# Altium PCB ESP32_Board.PcbDoc
Units mm, origin at the board's own origin, x right, y up, seen from the top; angles counter-clockwise.
Board outline 45.1 x 40 mm, 4 copper layers (L1 (SIG), L2 (GND), L3 (GND), L4 (SIG)), stack 1.586 mm thick; 43 components, 35 nets, 167 pads, 0 vias.
Unrouted connection lines stored in the file: 103.
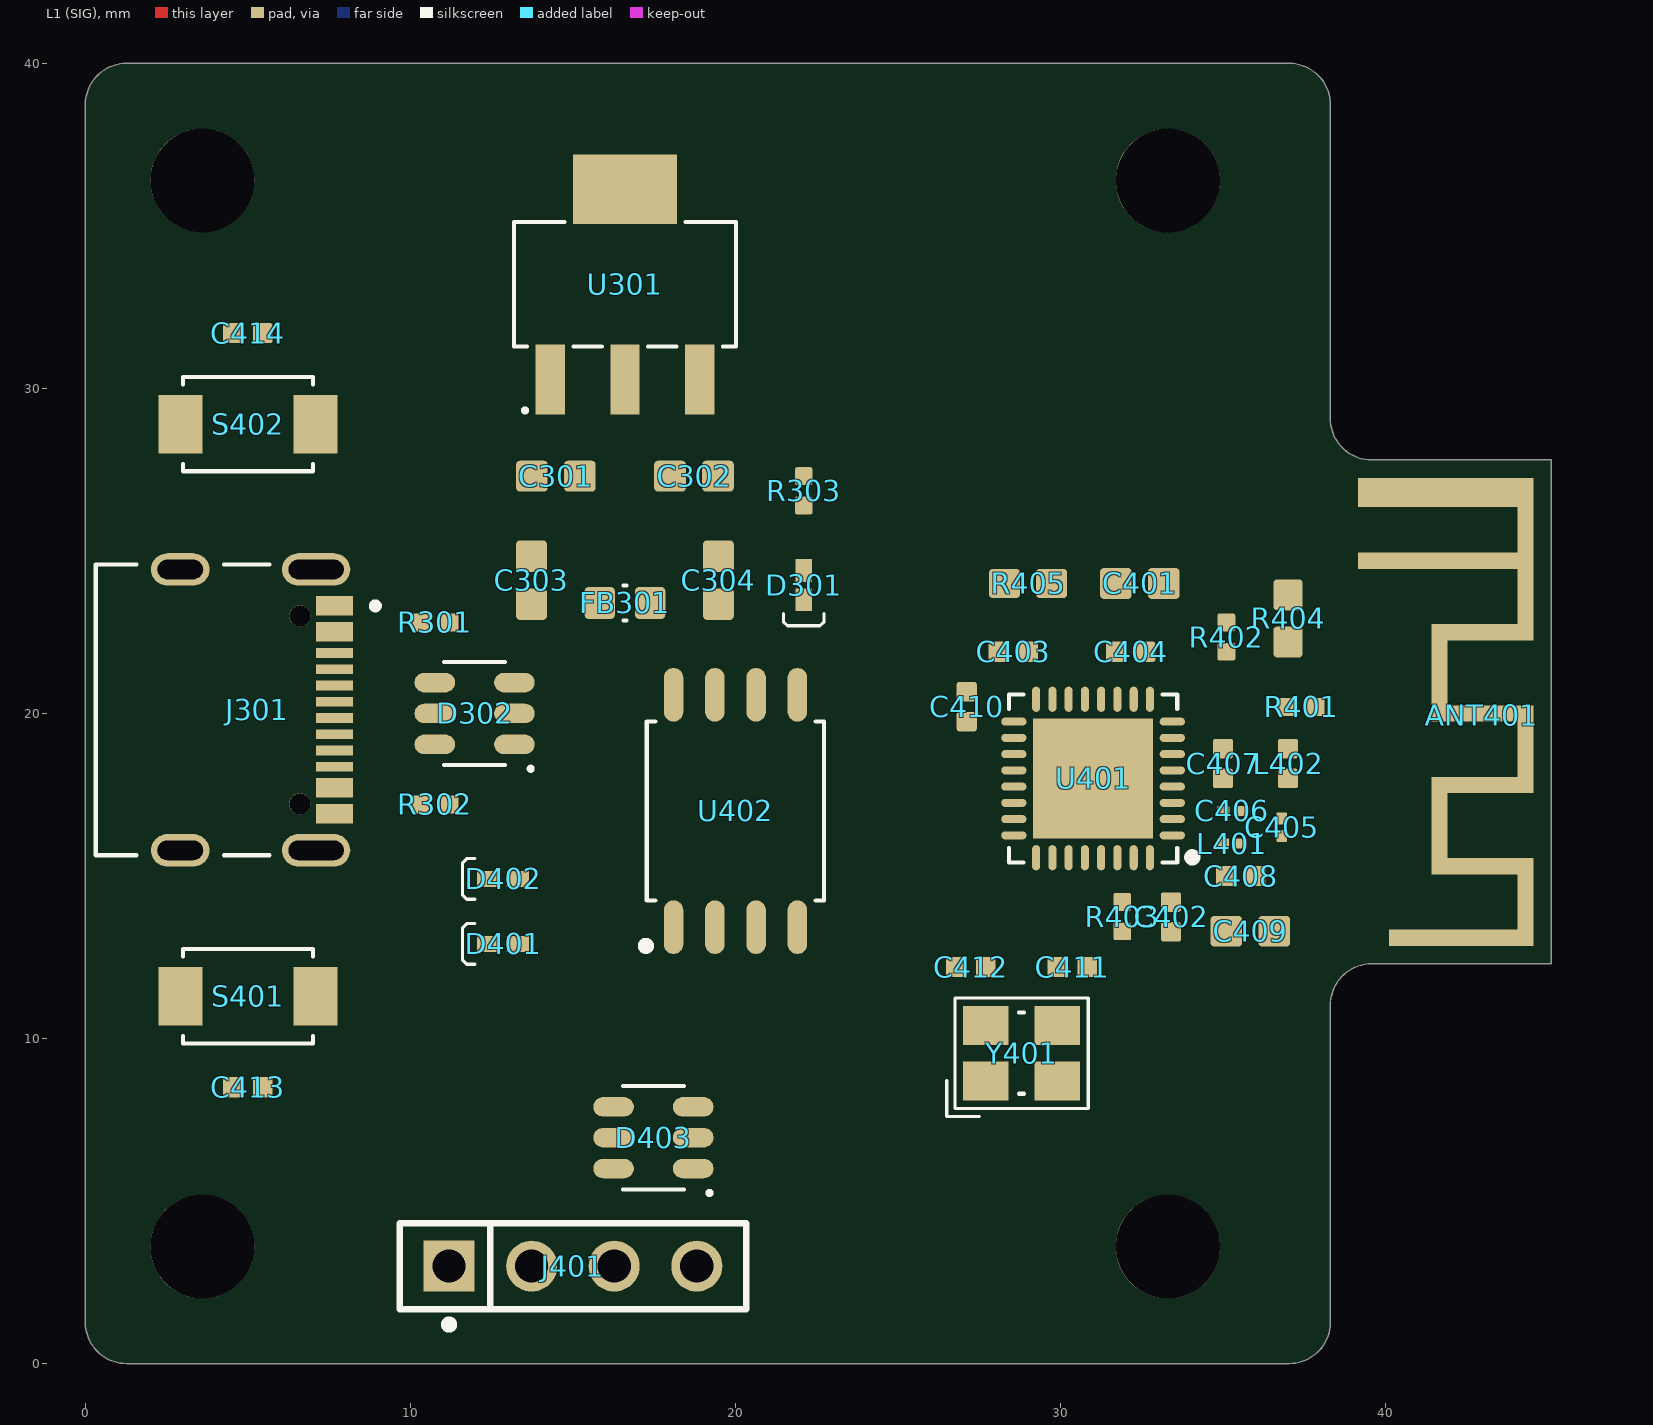
[diagram p0: L1 (SIG) view]
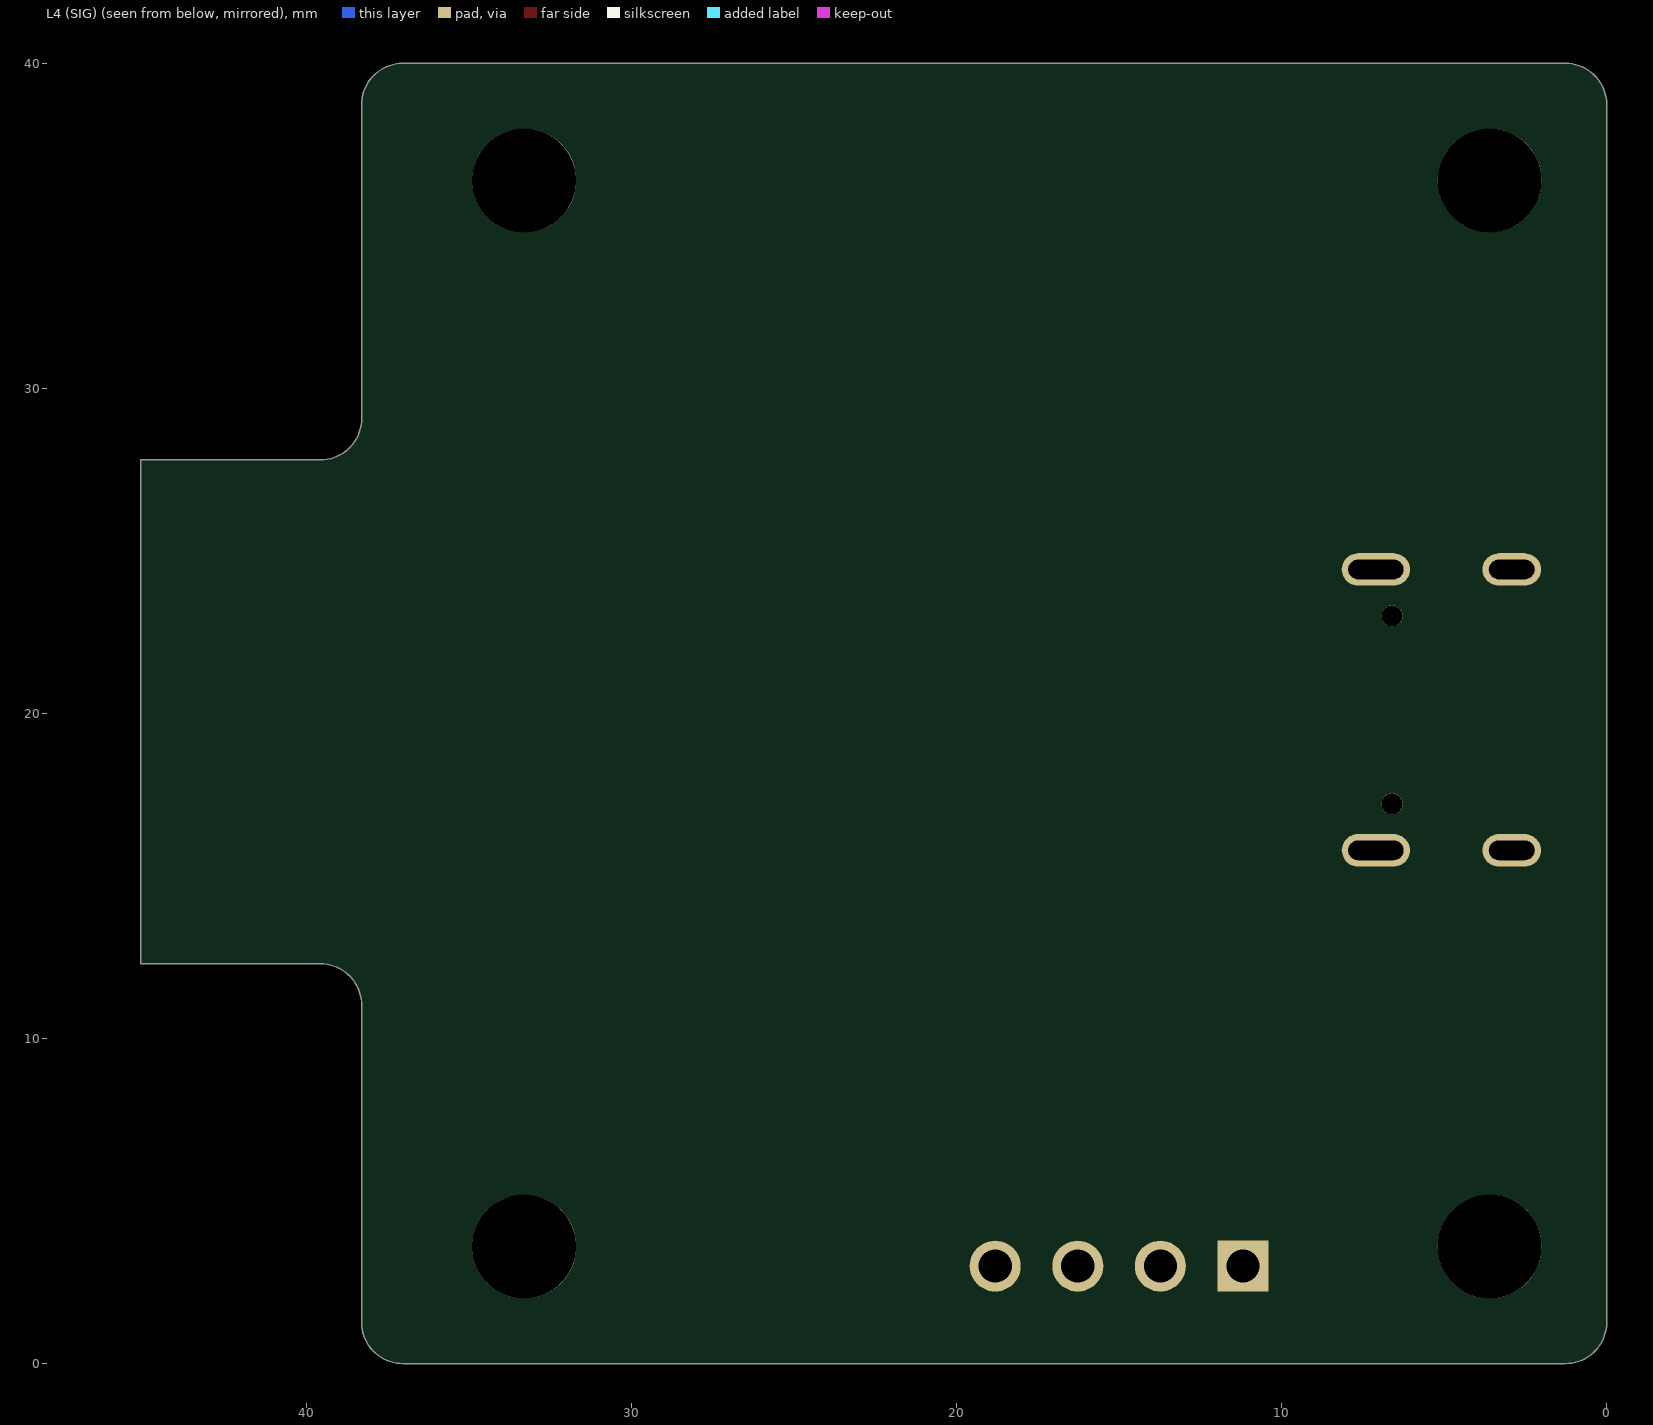
[diagram p1: L4 (SIG) view, seen from below]

## Layer stack, top to bottom
Top Solder: solder mask 0.0102, Solder Resist, Dk 3.5
L1 (SIG): signal copper 0.035
Dielectric 2: prepreg 0.2104, PP-023, Dk 4.5
L2 (GND): signal copper 0.0152
Dielectric 1: core 1.065, Core-039, Dk 4.8
L3 (GND): signal copper 0.0152
Dielectric 3: prepreg 0.2104, PP-023, Dk 4.5
L4 (SIG): signal copper 0.035
Bottom Solder: solder mask 0.0102, Solder Resist, Dk 3.5

## Board outline
1.27,0 cw(c1.27,1.27) 0,1.27 0,38.73 cw(c1.27,38.73) 1.27,40 37.03,40 cw(c37.03,38.73) 38.3,38.73 38.3,29.07 ccw(c39.57,29.07) 39.57,27.8 45.1,27.8 45.1,12.3 39.57,12.3 ccw(c39.57,11.03) 38.3,11.03 38.3,1.27 cw(c37.03,1.27) 37.03,0

## Design rules (kind name [scope] priority, off if disabled: settings)
Clearance [All] p1: gap=0.2 ignorepadtopadclearanceinfootprint=TRUE except(0.3: Arc-Arc Arc-Track Track-Track; 0.45: THPad-THPad)
DiffPairsRouting DIFF90 [All] p1: maxlimit=0.254 minlimit=0.127 mostfreqgap=0.254 toplayer_maxgap=0.127 toplayer_prefgap=0.127 toplayer_minwidth=0.237 toplayer_maxwidth=0.237 toplayer_prefwidth=0.237 bottomlayer_maxgap=0.127 bottomlayer_prefgap=0.127 bottomlayer_minwidth=0.237 bottomlayer_maxwidth=0.237 bottomlayer_prefwidth=0.237 impedanceprofiledriven=TRUE impedanceprofileid={447BC607-A005-4FB5-B479-7A6E157B78A7} impedanceprofilevalue=90.000000 maxuncoupledlength=12.7 // USB Differential Pair
FabricationTestpoint [All] p1: side=3 testpointundercomponent=TRUE minsize=1.016 maxsize=2.54 preferedsize=1.524 minholesize=0 maxholesize=1.016 preferedholesize=0.813 testpointgrid=0.025 allowsidetop=TRUE allowsidebottom=TRUE usegrid=TRUE gridoriginx=0 gridoriginy=-25.4 gridtolerance=0
HoleSize [All] p1: absolutevalues=TRUE maxlimit=6 minlimit=0.2 maxpercent=80.000 minpercent=20.000
MinimumAnnularRing [All] p1: minimumring=0.254
PolygonConnect [All] p1: connectstyle=Relief reliefconductorwidth=0.254 reliefentries=4 polygonreliefangle="90 Angle" airgapwidth=0.254
RoutingVias [All] p1: holewidth=0.75 width=1 viastyle="Through Hole" minholewidth=0.25 minwidth=0.5 maxholewidth=1.35 maxwidth=1.5
SolderMaskExpansion [All] p1: expansion=0 istentingtop=FALSE
SupplyNets "Schematic Supply Nets_6" [InNet('VBUS')] p1: voltage=0.000
SupplyNets "Schematic Supply Nets_5" [InNet('+3V3')] p2: voltage=0.000
SupplyNets "Schematic Supply Nets_4" [InNet('+5V')] p3: voltage=0.000
SupplyNets "Schematic Supply Nets_3" [InNet('+5')] p4: voltage=0.000
SupplyNets "Schematic Supply Nets_2" [InNet('0v')] p5: voltage=0.000
SupplyNets "Schematic Supply Nets_1" [InNet('VDD_RF')] p6: voltage=0.000
SupplyNets "Schematic Supply Nets" [InNet('VDD_SPI')] p7: voltage=0.000
Width ANTSEC [InNet('ANT_RF')] p1: maxlimit=0.262 minlimit=0.26 preferedwidth=0.262 toplayer_maxwidth=0.26 toplayer_prefwidth=0.26 bottomlayer_maxwidth=0.26 bottomlayer_prefwidth=0.26 impedanceprofiledriven=TRUE impedanceprofileid={694589E5-AF03-4A5D-9D68-AE147B80789B} impedanceprofilevalue=50.000000 minimp=50.000000 maximp=50.000000 favimp=50.000000 // Antennta Single-End Coplanar
Width ANTSE [InNet('ANT_RF')] p2: maxlimit=0.262 minlimit=0.254 preferedwidth=0.262 midlayer1_minwidth=0.262 midlayer2_minwidth=0.262 impedanceprofiledriven=TRUE impedanceprofileid={CE452B70-105D-400C-BFE0-BA0D3DE67E57} impedanceprofilevalue=50.000000 minimp=50.000000 maximp=50.000000 favimp=50.000000 // Antenna Single-End
Width General [All] p3: maxlimit=1.5 minlimit=0.1 preferedwidth=0.254
27 further rules are at their usual default settings.

## Classes and differential pairs
component class "POWER SUPPLY": C301 C302 C303 C304 D301 D302 FB301 J301 R301 R302 R303 U301
component class "MCU RF & MEMORY": ANT401 C401 C402 C403 C404 C405 C406 C407 C408 C409 C410 C411 C412 C413 C414 D401 D402 D403 J401 L401 L402 R401 R402 R403 R404 R405 S401 S402 U401 U402 Y401
differential pair USB_D: +USB_D_P -USB_D_N
differential pair MCU_USB_D: +MCU_USB_D_P -MCU_USB_D_N

## Components (designator, comment, footprint, x,y, rotation, side; value= is the part's Value field where it differs from the comment)
ANT401 "PCB ANTENNA 2.4GHz 50ohm" ANT_IFA_2_4GHZ_50R 39.15,26.8 r270 top
C301 "4u7" CAPC1608X90N 14.475,27.3 r0 top
C302 "4u7" CAPC1608X90N 18.725,27.3 r180 top
C303 "2u2" CAPC1608X90N 13.725,24.1 r90 top
C304 "2u2" CAPC1608X90N 19.475,24.1 r90 top
C401 "10u" CAPC1608X90N 32.437,24 r0 top
C402 "100n" CAPC1005X55N 33.4,13.74 r270 top
C403 "100n" CAPC1005X55N 28.54,21.9 r0 top
C404 "100n" CAPC1005X55N 32.16,21.9 r0 top
C405 "1.8p" CAPC0603X23L 36.8,16.5 r90 top
C406 "1.8p" CAPC0603X23L 35.27,17 r0 top
C407 "100n" CAPC1005X55N 35,18.46 r90 top
C408 "100n" CAPC1005X55N 35.54,15 r0 top
C409 "10u" CAPC1608X90N 35.838,13.3 r0 top
C410 "100n" CAPC1005X55N 27.115,20.212 r90 top
C411 "10p" CAPC1005X55N 30.36,12.2 r0 top
C412 "10p" CAPC1005X55N 27.24,12.2 r180 top
C413 "100n" CAPC1005X55N 5,8.5 r180 top
C414 "100n" CAPC1005X55N 5,31.7 r180 top
D301 "LED_0402_RED" LEDC0402 22.1,23.95 r270 top
D302 "USBLC6-2" SOT95P280X145-6N 11.975,20 r180 top
D401 "LED_0402_GREEN" LEDC0402 12.855,12.91 r180 top
D402 "LED_0402_GREEN" LEDC0402 12.855,14.91 r180 top
D403 "USBLC6-2" SOT95P280X145-6N 17.475,6.95 r180 top
FB301 "120R" FBC1608X95N 16.6,23.4 r0 top
J301 "TYPE-C 16PIN 2MD(073)" SHOUHAN_TYPE-C_16PIN_2MD_(073) 3.995,20.11 r270 top
J401 "M20-9990445" FP-M20-9990445-MFG 15,3 r0 top
L401 "2n2" INDC0603X33L 35.273,16 r180 top
L402 "2n2" INDC1005X55N 37,18.46 r90 top
R301 "5K1" RESC1005X37N 10.75,22.8 r0 top
R302 "5K1" RESC1005X37N 10.75,17.2 r0 top
R303 "1K" RESC1005X37N 22.1,26.85 r270 top
R401 "1K" RESC1005X37N 37.4,20.2 r0 top
R402 "1K" RESC1005X37N 35.1,22.35 r90 top
R403 "22R" RESC1005X37N 31.9,13.75 r270 top
R404 "5K1" RESC1608X47N 37,22.925 r90 top
R405 "5K1" RESC1608X47N 29,24 r180 top
S401 "TS-1088-AR02016" SW_TS-1088-AR02016 5,11.3 r180 top
S402 "TS-1088-AR02016" SW_TS-1088-AR02016 5,28.9 r180 top
U301 "AP2114HA" SOT230P700X180-4N 16.6,33.2 r90 top
U401 "ESP32-C3" QFN50P500X500X90-33N 31,18 r180 top
U402 "GD25Q16ESIGR" SOP127P790X216-8N 20,17 r90 top
Y401 "5YMA40000151SF40E1" XTAL_C3E-16.000-12-1015-R 28.8,9.55 r0 top

## Footprints (in the part's own frame and the unit in brackets; to place one, negate y for a bottom-side part, rotate by r counter-clockwise, add the part's x,y. Pads: shape width x height; smd on the part's side, far side on the other; paste and mask are expansions set on the pad)
ANT_IFA_2_4GHZ_50R [mm] "Inverted F 2.4GHz ISM PCB Antenna 50 Ohm"
  rect 5x0.5 smd paste-2539.97 mask+0.102: 1(2.05,5.15)
  rect 0.5x4.9 smd paste-2539.97 mask+0.102: 1(2.1,2.45)
  rect 0.5x2.64 smd paste-2539.97 mask+0.102: 1(4.3,3.58) 1(6.8,3.58) 1(9,3.58) 1(11.5,3.58)
  rect 2x0.5 smd paste-2539.97 mask+0.102: 1(5.55,2.51) 1(10.25,2.51)
  rect 2.7x0.5 smd paste-2539.97 mask+0.102: 1(7.9,5.15) 1(12.6,5.15)
  rect 0.5x3.94 smd paste-2539.97 mask+0.102: 1(13.7,2.93)
  rect 0.9x4.9 smd paste-2539.97 mask+0.102: 2(0,2.45)
CAPC0603X23L [mm] "Chip Capacitor, 2-Leads, Body 0,60x0,30mm, IPC High Density"
  rrect25% 0.38x0.32 smd: 1(-0.27,0) 2(0.27,0)
  body extent -0.3,-0.15 0.3,0.15, height 0.23
CAPC1005X55N [mm] "Chip Capacitor, 2-Leads, Body 1,00x0,50mm, IPC Medium Density"
  rrect25% 0.6x0.62 smd: 1(-0.46,0) 2(0.46,0)
  body extent -0.5,-0.25 0.5,0.25, height 0.55
CAPC1608X90N [mm] "Chip Capacitor, 2-Leads, Body 1,60x0,80mm, IPC Medium Density"
  rrect25% 0.975x0.95 smd: 1(-0.737,0) 2(0.738,0)
  body extent -0.8,-0.4 0.8,0.4, height 0.9
FBC1608X95N [mm] "Chip Ferrite Bead, 2-Leads, Body 1,60x0,80mm, IPC Medium Density"
  rrect25% 0.93x0.98 smd: 1(-0.775,0) 2(0.775,0)
  silkscreen extent -0.05,-0.54 0.05,0.54, body extent -0.8,-0.4 0.8,0.4, height 0.95
FP-M20-9990445-MFG [mm]
  rect 1.57x1.57 hole 1.02 paste-2539.97 mask+0: 1(-3.81,0)
  round 1.57 hole 1.02 paste-2539.97 mask+0: 2(-1.27,0) 3(1.27,0) 4(3.81,0)
  silkscreen extent -5.33,-1.92 5.33,1.32, body extent -5.43,-1.42 5.43,1.42, height 0.25
INDC0603X33L [mm] "Chip Inductor, 2-Leads, Body 0,60x0,30mm, IPC High Density"
  rrect25% 0.375x0.32 smd: 1(-0.272,0) 2(0.273,0)
  body extent -0.32,-0.17 0.32,0.17, height 0.33
INDC1005X55N [mm] "Chip Inductor, 2-Leads, Body 1,00x0,50mm, IPC Medium Density"
  rrect25% 0.6x0.62 smd: 1(-0.46,0) 2(0.46,0)
  body extent -0.53,-0.28 0.53,0.28, height 0.55
LEDC0402 [mm]
  rect 0.7x0.5 smd mask+0.05: 1(-0.45,0) 2(0.45,0)
  silkscreen extent 0.87,-0.63 1.25,0.63, body extent -0.5,-0.25 0.5,0.25, height 0.5
QFN50P500X500X90-33N [mm] "QFN, 32-Leads, Body 5,00x5,00mm, Pitch 0,50mm, Thermal Pad 3,70x3,70mm, IPC Medium Density"
  oval 0.775x0.25 smd: 1(-2.438,1.75) 2(-2.438,1.25) 3(-2.438,0.75) 4(-2.438,0.25) 5(-2.438,-0.25) 6(-2.438,-0.75) 7(-2.438,-1.25) 8(-2.438,-1.75) 17(2.437,-1.75) 18(2.437,-1.25) 19(2.437,-0.75) 20(2.437,-0.25) 21(2.437,0.25) 22(2.437,0.75) 23(2.437,1.25) 24(2.437,1.75)
  oval 0.25x0.775 smd: 9(-1.75,-2.437) 10(-1.25,-2.437) 11(-0.75,-2.437) 12(-0.25,-2.437) 13(0.25,-2.437) 14(0.75,-2.437) 15(1.25,-2.437) 16(1.75,-2.437) 25(1.75,2.438) 26(1.25,2.438) 27(0.75,2.438) 28(0.25,2.438) 29(-0.25,2.438) 30(-0.75,2.438) 31(-1.25,2.438) 32(-1.75,2.438)
  rect 3.7x3.7 smd paste-1.85: 33(0,0)
  silkscreen extent -3.18,-2.59 2.59,2.59, body extent -2.55,-2.55 2.55,2.55, height 0.9
RESC1005X37N [mm] "Chip Resistor, 2-Leads, Body 1,00x0,50mm, IPC Medium Density"
  rrect25% 0.55x0.55 smd: 1(-0.45,0) 2(0.45,0)
  body extent -0.5,-0.25 0.5,0.25, height 0.37
RESC1608X47N [mm] "Chip Resistor, 2-Leads, Body 1,60x0,80mm, IPC Medium Density"
  rrect25% 0.95x0.9 smd: 1(-0.725,0) 2(0.725,0)
  body extent -0.8,-0.4 0.8,0.4, height 0.47
SHOUHAN_TYPE-C_16PIN_2MD_(073) [mm]
  rect 0.6x1.15 smd paste+0 mask+0: A1_B12(-3.2,3.67) A4_B9(-2.4,3.67) B1_A12(3.2,3.67) B4_A9(2.4,3.67)
  rect 0.3x1.15 smd paste+0 mask+0: A5(-1.25,3.67) A6(-0.25,3.67) A7(0.25,3.67) A8(1.25,3.67) B5(1.75,3.67) B6(0.75,3.67) B7(-0.75,3.67) B8(-1.75,3.67)
  oval 1x1.8 hole 0.6 slot 1.4 at 90 deg mask+0.102: SH1(-4.32,-1.075) SH2(4.32,-1.075)
  oval 1x2.1 hole 0.6 slot 1.7 at 90 deg mask+0.102: SH3(-4.32,3.105) SH4(4.32,3.105)
  round 0.65 hole 0.65 unplated mask+0: ""(-2.89,2.605) ""(2.89,2.605)
  silkscreen extent -4.47,-3.67 4.47,5.02, body extent -4.47,-3.67 4.47,3.98, height 3.26
SOP127P790X216-8N [mm] "SOP, 8-Leads, Body 5,23x5,28mm, Pitch 1,27mm, IPC Medium Density"
  oval 1.65x0.6 smd: 1(-3.575,1.905) 2(-3.575,0.635) 3(-3.575,-0.635) 4(-3.575,-1.905) 5(3.575,-1.905) 6(3.575,-0.635) 7(3.575,0.635) 8(3.575,1.905)
  silkscreen extent -4.27,-2.73 2.75,2.88, body extent -3.95,-2.67 3.95,2.67, height 2.16
SOT95P280X145-6N [mm] "SOT23, 6-Leads, Body 2,93x2,80mm, Pitch 0,95mm, IPC Medium Density"
  oval 1.25x0.6 smd: 1(-1.225,0.95) 2(-1.225,0) 3(-1.225,-0.95) 4(1.225,-0.95) 5(1.225,0) 6(1.225,0.95)
  silkscreen extent -1.79,-1.59 0.94,1.76, body extent -1.6,-1.53 1.6,1.53, height 1.45
SOT230P700X180-4N [mm] "SOT223, 4-Leads, Body 6,50x7,00mm (avg), Pitch 2,30mm, IPC Medium Density"
  rect 2.15x0.9 smd: 1(-2.925,2.3) 2(-2.925,0) 3(-2.925,-2.3)
  rect 2.15x3.2 smd: 4(2.925,0)
  silkscreen extent -3.94,-3.41 1.91,3.41, body extent -3.5,-3.35 3.5,3.35, height 1.8
SW_TS-1088-AR02016 [mm]
  rect 1.35x1.8 smd: 1(-2.075,0) 2(2.075,0)
  silkscreen extent -2,-1.45 2,1.45, body extent -2.4,-1.45 2.4,1.45, height 2
XTAL_C3E-16.000-12-1015-R [mm]
  rect 1.4x1.2 smd: 1(-1.1,-0.85) 2(1.1,-0.85) 3(1.1,0.85) 4(-1.1,0.85)
  silkscreen extent -2.3,-1.95 2.05,1.7, body extent -1.6,-1.25 1.6,1.25, height 0.75

## Part data
ANT401: library part ANT_IFA_USB_2_4GHZ_50R, "Inverted F 2.4GHz ISM PCB Antenna 50 Ohm"
C301 C302 C303 C304 C401 C409: library part CAP_0603_16V, "Capacitor SMD 0603 16V"
C402 C403 C404 C407 C408 C410 C411 C412 C413 C414: library part CAP_0402_16V, "Capacitor SMD 0402 16V"
C405 C406: library part CAP_0201_16V, "Capacitor SMD 0201 16V"
D301: "LED RED SMD 0402"
D302 D403: "-40℃~+125℃ 150nA 17V 2 3.5pF 5.25V 5A 6V ESD IEC 61000-4-2 Unidirectional SOT-23-6L ESD and Surge Protection (TVS/ESD) ROHS"
D401 D402: "LED GREEN SMD 0402"
FB301: library part FB_0603, "Ferrite Bead SMD 0603"
J301: "DC-5V 5A Type C USB"
J401: library part CMP-00671-05399696-1, "M20-9990445 Conn Unshrouded Header HDR 4 POS 2.54mm Solder ST Thru-Hole Bulk/Loose", Case/Package=SIL, Color=Black, Contact Resistance=25mΩ, Current Rating=3A, Insulation Resistance=10GΩ, Max Operating Temperature=105°C, Min Operating Temperature=-40°C, Voltage Rating (AC)=750V, Connector Type="Male Pin", Contact Material="Brass, Bronze, Gold, Nickel", Contact Mating Length=6.096mm, Contact Plating=Gold, Depth=2.54mm, Gender=Male, Height=2.54mm, Housing Color=Black, Housing Material=Nylon, Lead Pitch=2.54mm, Length=10.16mm, Max Current Rating=3A, Mount="Through Hole", NexarPartId=5399696, Number Of Contacts=4, Number of Pins=4, Number of Positions=4, Number of Rows=1, Orientation=Straight, Pitch=2.54mm, Radiation Hardening=No, REACH SVHC="No SVHC", RoHS=Compliant, Termination=Solder, Voltage Rating (DC)=750V, Weight=45.359237g, Width=12.7mm
L401: library part IND_0201, "Inductor SMD 0201"
L402: library part IND_0402, "Inductor SMD 0402"
R301 R302 R303 R401 R402 R403: library part RES_0402, "Resistor SMD 0402"
R404 R405: library part RES_0603, "Resistor SMD 0603"
S401 S402: "50mA 4mm 100MÎ© 100,000 Times 12V 160gf 3mm 2mm Round Button Vertical welding SPST SMD Tactile Switches ROHS"
U301: library part AP2114HA-3.3TRG1, "-40℃~+85℃@(Ta) 1 1A 3.3V 30uVrms 65dB@(1kHz) 65uA 6V 750mV@(1A) Fixed Over Current Protection、Thermal Shutdown、使能控制 Positive SOT-223 Voltage Regulators - Linear, Low Drop Out (LDO) Regulators ROHS", Supplier 1=Newark, Supplier Part Number 1=AP2114HA-3.3TRG1
U401: "WiFi Modules (802.11) (Engineering Samples Only) SMD IC ESP32-C3, RISC-V single-core MCU, 2.4G Wi-Fi & BLE 5.0 combo, QFN 32-pin, 5*5 mm, 40 ~ 105C", Supplier Part Number 1=1904-ESP32-C3CT-ND, Supplier 1=DigiKey
U402: "100,000 cycles 11uA 133MHz 150ms@(32KB) 16Mbit 2.7V~3.6V 20 Years 400us SPI SOP-8-208mil NOR FLASH ROHS"
Y401: "-20℃~+85℃ 15pF 40MHz 40Ω Crystal Oscillator ±10ppm ±10ppm SMD3225-4P Crystals ROHS"

## Free pads (board coordinates)
  round 3.2 hole 3.2 unplated paste-2539.97 mask+0.025: MH(3.6,3.6) MH(3.6,36.4) MH(33.3,3.6) MH(33.3,36.4)

## Nets (pads, with @x,y where several pads share a name; then routed paths per layer and width w, separated by ;. In a path a pad name is that pad's centre, name@x,y a point inside that pad or via, vN(x,y) a via of type N, cw(c..) or ccw(c..) an arc to the next point about the centre after c; other vN are vias at no path point)
0v: ANT401.2 C301.2 C302.2 C303.2 C304.2 C401.2 C402.2 C403.2 C404.2 C405.2 C406.2 C407.2 C408.2 C409.2 C410.2 C411.2 C412.2 C413.2 C414.2 D301.2 D302.2 D401.2 D402.2 D403.2 J301.A1_B12 J301.B1_A12 J401.4 R301.2 R302.2 S401.2 S402.2 U301.2 U301.4 U401.33 U402.4 Y401.2 Y401.4
+3V3: C302.1 C401.1 C402.1 C403.1 C404.1 C408.1 C409.1 L402.2 R303.1 R404.2 R405.2 U301.3 U401.11 U401.17 U401.31 U401.32
+5: C301.1 C304.1 FB301.2 U301.1
+5V: D403.5 J401.1
ANT_RF: ANT401.1 C405.1 L401.1
MCU_BOOT: C414.1 R405.1 S402.1 U401.15
MCU_EN: C413.1 R404.1 S401.1 U401.7
MCU_LED_A: R401.1 U401.6
MCU_LED_B: R402.1 U401.8
MCU_LNA_IN: C406.1 L401.2 U401.1
MCU_RXD: D403.3 U401.27
MCU_TXD: D403.1 U401.28
MCU_USB_D_N: D302.3 U401.25
MCU_USB_D_P: D302.1 U401.26
MCU_XTAL_N: C411.1 U401.29 Y401.3
MCU_XTAL_P: R403.1 U401.30
MEM_SPICLK: U401.22 U402.6
MEM_SPICS0: U401.21 U402.1
MEM_SPID: U401.23 U402.5
MEM_SPIHD: U401.19 U402.7
MEM_SPIQ: U401.24 U402.2
MEM_SPIWP: U401.20 U402.3
NetD401_1: D401.1 R401.2
NetD402_1: D402.1 R402.2
PWR_LED_A: D301.1 R303.2
RXD: D403.4 J401.3
TXD: D403.6 J401.2
USB_CC1: J301.A5 R301.1
USB_CC2: J301.B5 R302.1
USB_D_N: D302.4 J301.A7 J301.B7
USB_D_P: D302.6 J301.A6 J301.B6
VBUS: C303.1 D302.5 FB301.1 J301.A4_B9 J301.B4_A9
VDD_RF: C407.1 L402.1 U401.2 U401.3
VDD_SPI: C410.1 U401.18 U402.8
XTAL_IN: C412.1 R403.2 Y401.1
pads on no net: J301. J301.A8 J301.B8 J301.SH1 J301.SH2 J301.SH3 J301.SH4 U401.4 U401.5 U401.9 U401.10 U401.12 U401.13 U401.14 U401.16

## Silkscreen, mask and mechanical layers (free items; w line width, h text height)
Mechanical 1:
  lines w0.1: 0,1.27 ccw(c1.27,1.27) 1.27,0 37.03,0 ccw(c37.03,1.27) 38.3,1.27 38.3,11.03 cw(c39.57,11.03) 39.57,12.3 45.1,12.3 45.1,27.8 39.57,27.8 cw(c39.57,29.07) 38.3,29.07 38.3,38.73 ccw(c37.03,38.73) 37.03,40 1.27,40 ccw(c1.27,38.73) 0,38.73 0,3.6 0,1.27